# Altium PCB Watch_Input_PCB_Layout.PcbDoc
Units mil, origin at the board's own origin, x right, y up, seen from the top; angles counter-clockwise.
Board outline 1970 x 1500 mil, 2 copper layers (Top Layer, Bottom Layer); 9 components, 8 nets, 29 pads, 0 vias.
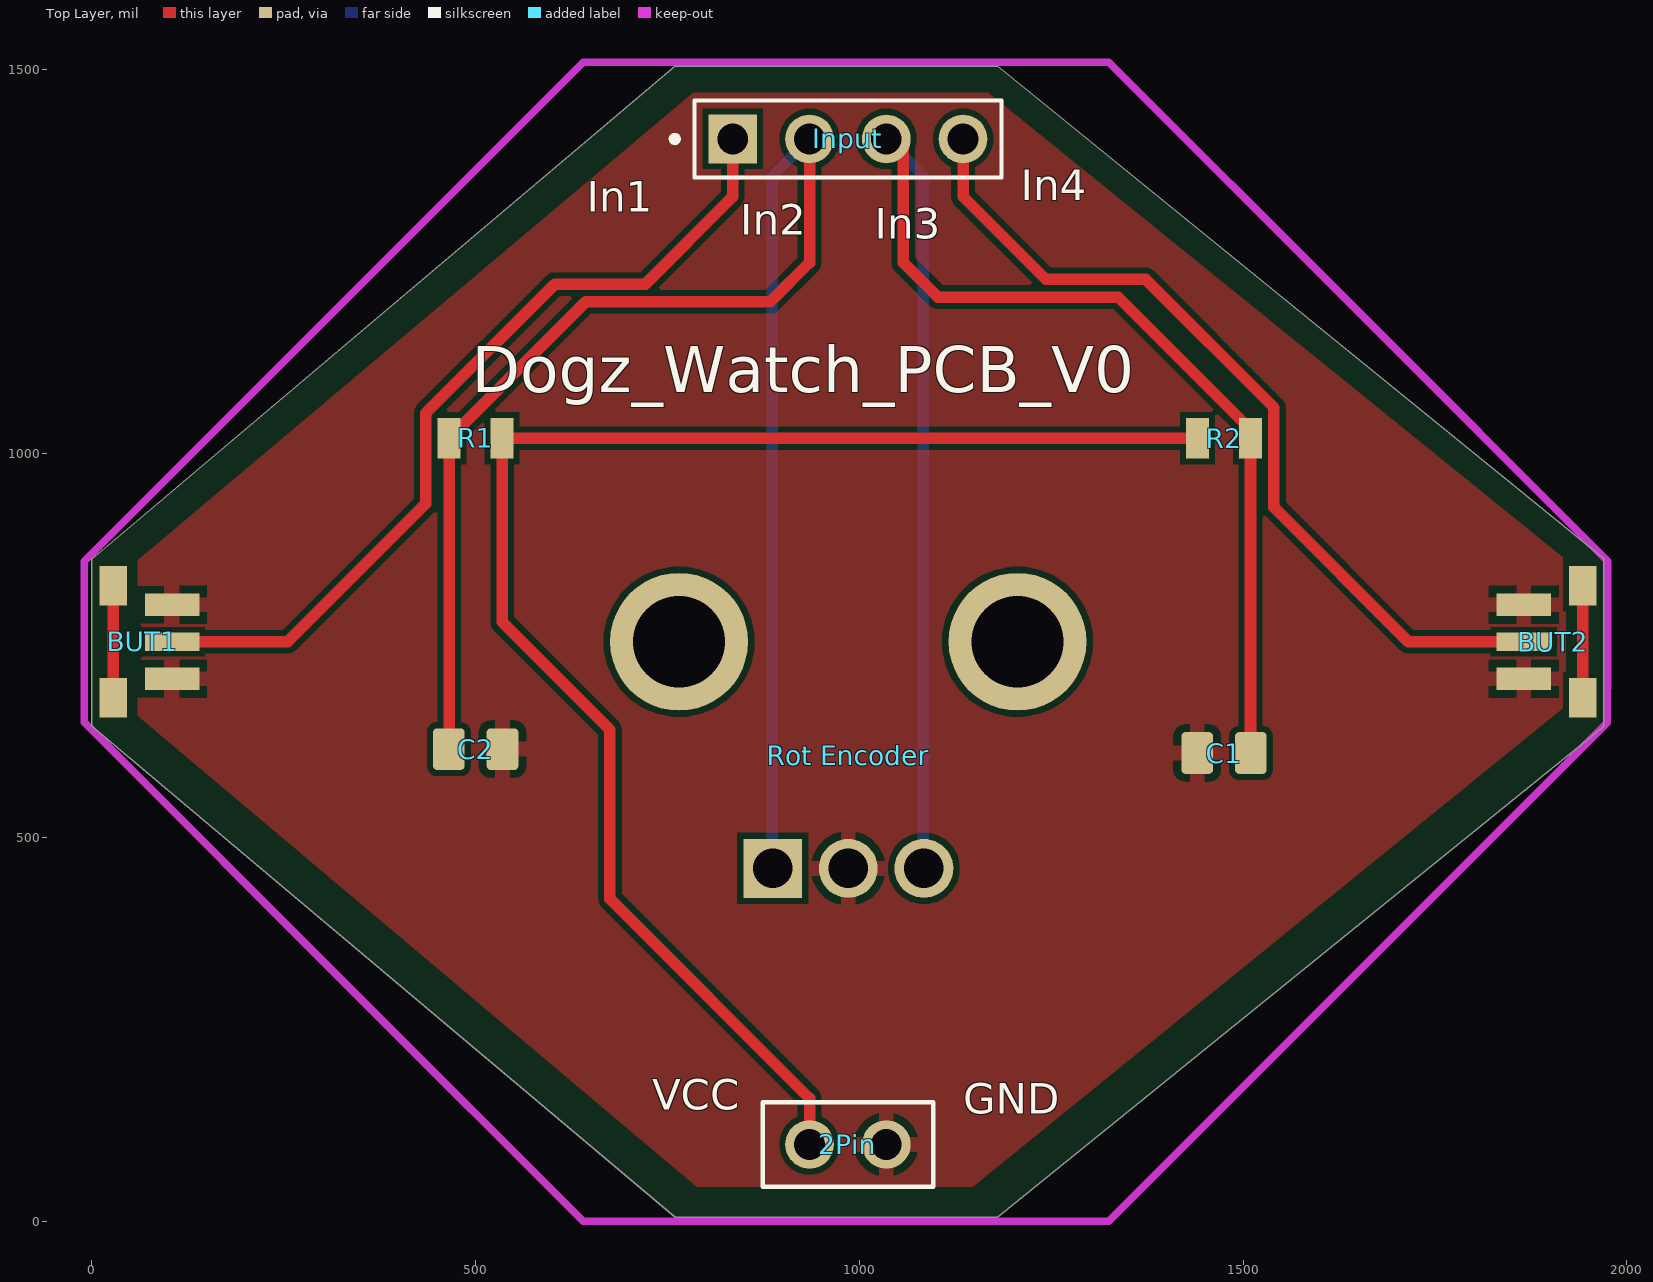
[diagram p0: Top Layer view]
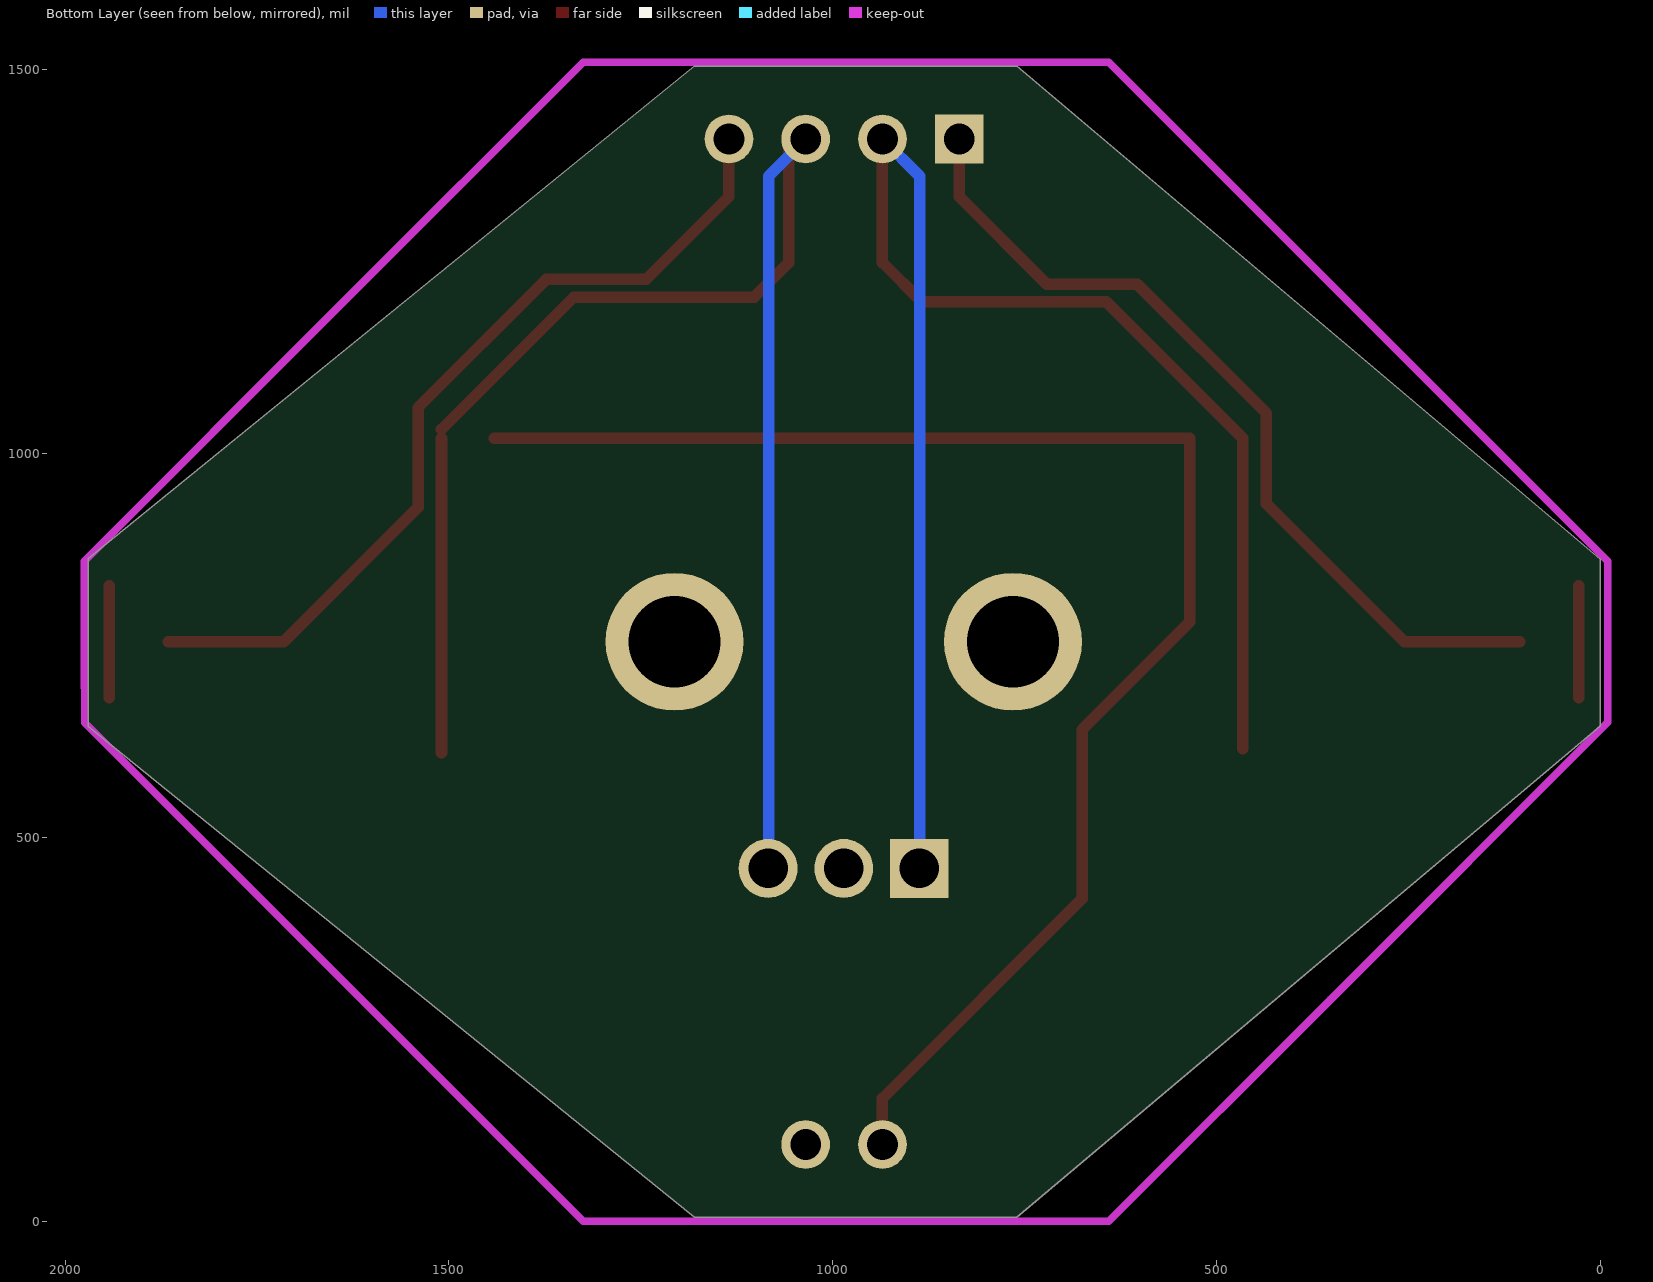
[diagram p1: Bottom Layer view, seen from below]

## Layer stack, top to bottom
Top Solder: solder mask 0.4, Solder Resist, Dk 3.5
Top Layer: signal copper 1.4
Dielectric 1: dielectric 12.6, FR-4, Dk 4.8
Bottom Layer: signal copper 1.4
Bottom Solder: solder mask 0.4, Solder Resist, Dk 3.5

## Board outline
1970,862.92 1970,645 1180,5 760,5 0,645 0,862.79 760,1505 1180,1505

## Design rules (kind name [scope] priority, off if disabled: settings)
BoardOutlineClearance [All] p1: gap=7.87 ignorepadtopadclearanceinfootprint=FALSE except(15.75: Arc-SplitBarrior Arc-SplitContinuation Track-SplitBarrior Track-SplitContinuation SMDPad-SplitBarrior SMDPad-SplitContinuation THPad-SplitBarrior THPad-SplitContinuation Via-SplitBarrior Via-SplitContinuation Fill-SplitBarrior Fill-SplitContinuation Poly-SplitBarrior Poly-SplitContinuation Region-SplitBarrior Region-SplitContinuation Text-SplitBarrior Text-SplitContinuation)
Clearance "Clearance Bottom Layer" [OnLayer('Bottom Layer')] p1: gap=8 ignorepadtopadclearanceinfootprint=TRUE except(10: Arc-Text Track-Text SMDPad-Text THPad-Text Via-Text Fill-Text Poly-Text Region-Text Text-Text)
Clearance "Clearance Top Layer" [OnLayer('Top Layer')] p2: gap=8 ignorepadtopadclearanceinfootprint=TRUE except(10: Arc-Text Track-Text SMDPad-Text THPad-Text Via-Text Fill-Text Poly-Text Region-Text Text-Text)
Clearance [All] p3: gap=7.87 ignorepadtopadclearanceinfootprint=FALSE except(3.5: Arc-Arc Arc-Track Arc-SMDPad Track-Track Track-SMDPad SMDPad-SMDPad; 5: Arc-Via Track-Via SMDPad-Via THPad-Via Via-Via; 10: Arc-Text Track-Text SMDPad-Text THPad-Text Via-Text Fill-Text Poly-Text Region-Text Text-Text)
HoleSize [All] p1: absolutevalues=TRUE maxlimit=248.03 minlimit=7.87 maxpercent=80.000 minpercent=20.000
MinimumAnnularRing [All] p1: minimumring=3
MinimumSolderMaskSliver [All] p1: minsoldermaskwidth=3.94
PolygonConnect PolygonConnect_1 [All] p1: thpad.connectstyle=Relief thpad.reliefconductorwidth=20 thpad.reliefentries=4 thpad.polygonreliefangle="90 Angle" thpad.airgapwidth=10 smdpad.connectstyle=Relief smdpad.reliefconductorwidth=20 smdpad.reliefentries=4 smdpad.polygonreliefangle="90 Angle" smdpad.airgapwidth=10 via.connectstyle=Direct via.reliefconductorwidth=20 via.reliefentries=4 via.polygonreliefangle="90 Angle" via.airgapwidth=10
RoutingCorners [All] p1: cornerstyle=Round minsetback=100 maxsetback=100
RoutingVias [All] p1: holewidth=19.68 width=39.37 viastyle="Through Hole" minholewidth=7.87 minwidth=17.72 maxholewidth=39.37 maxwidth=78.74
SilkToSilkClearance [All] p1: silktosilkclearance=3.94
SilkToSolderMaskClearance [IsPad] p1: minsilkscreentomaskgap=3.94 clearancetoexposedcopper=TRUE
SolderMaskExpansion [All] p1: expansion=4 istentingtop=FALSE
SupplyNets "Schematic Supply Nets_1" [InNet('GND')] p1: voltage=0.000
SupplyNets "Schematic Supply Nets" [InNet('VCC')] p2: voltage=0.000
Width [All] p1: maxlimit=100 minlimit=3.5 preferedwidth=15
25 further rules are at their usual default settings.

## Components (designator, comment, footprint, x,y, rotation, side; value= is the part's Value field where it differs from the comment)
2Pin "PRPC002SAAN-RC" CONN_PRPC002SAAN-RC_SUL 1035,100 r180 top (schematic designator 2pin)
BUT1 "1977067-1" TE_1977067-1 75,755 r270 top
BUT2 "1977067-1" TE_1977067-1 1895,755 r90 top
C1 "CL21B104KBCNNNC" CAPC2012X95N 1475,610 r0 top
C2 "CL21B104KBCNNNC" CAPC2012X95N 500,615 r180 top
Input "61300411121" WURTH_61300411121 985,1410 r0 top
R1 "RC0805FR-0710KP" RES_RC0805_2X1P25_YAG 500,1020 r0 top
R2 "RC0805FR-0710KP" RES_RC0805_2X1P25_YAG 1475,1020 r0 top
"Rot Encoder" "PES12-40S-N0024" PES1240SN0024 887.05,459.72 r0 top

## Footprints (in the part's own frame and the unit in brackets; to place one, negate y for a bottom-side part, rotate by r counter-clockwise, add the part's x,y. Pads: shape width x height; smd on the part's side, far side on the other; paste and mask are expansions set on the pad)
CAPC2012X95N [mm]
  rrect25% 1.05x1.38 smd: 1(-0.888,0) 2(0.888,0)
  body extent -1,-0.63 1,0.63, height 0.95
CONN_PRPC002SAAN-RC_SUL [mil]
  round 63.37 hole 40 paste-99999 mask+0: 1(0,0) 2(100,0)
  silkscreen extent -61,-55 161,55
PES1240SN0024 [mm]
  rect 1.95x1.95 hole 1.3: A1(0,0)
  round 1.95 hole 1.3: B1(5,0) C1(2.5,0)
  round 4.562 hole 3.041: MH1(-3.1,7.5) MH2(8.1,7.5)
RES_RC0805_2X1P25_YAG [mil]
  rect 30x53 smd paste+0 mask+0: 1(-34.5,0) 2(34.5,0)
TE_1977067-1 [mm]
  rect 0.75x1.8 smd: 1(-1.225,0.75) 3(1.225,0.75)
  rect 0.6x1.8 smd: 2(0,0.75)
  rect 1.3x0.9 smd: P1(-1.85,-1.2) P2(1.85,-1.2)
WURTH_61300411121 [mil]
  rect 63.37x63.37 hole 40: 01(-150,0)
  round 63.37 hole 40: 02(-50,0) 03(50,0) 04(150,0)
  silkscreen extent -230,-50 200,50, body extent -200,-50 200,50, height 286

## Part data
2Pin: "CONN HEADER .100 SNGL STR 2POS", Manufacturer_Name=Sullins, Copyright="Copyright (C) 2025 Ultra Librarian. All rights reserved.", Manufacturer_Part_Number=PRPC002SAAN-RC, RefDes=RefDes, Type=Type
BUT1 BUT2: "Switch Tactile OFF (ON) SPST Round Button Gull Wing 0.05A 12VDC 100000Cycles 1.57N SMD T/R", Package=None, Availability=Warning, Check_prices=https://www.snapeda.com/parts/1977067-1/TE%20Connectivity%20ALCOSWITCH%20Switches/view-part/2191392/?ref=eda, MF="TE Connectivity", MP=1977067-1, Price=None, SnapEDA_Link=https://www.snapeda.com/parts/1977067-1/TE%20Connectivity%20ALCOSWITCH%20Switches/view-part/2191392/?ref=snap
C1 C2: "0.1 ÂµF Â±10% 50V Ceramic Capacitor X7R 0805 (2012 Metric)", Package="SMD-2 Samsung", Check_prices=https://www.snapeda.com/parts/CL21B104KBCNNNC/Samsung/view-part/?ref=eda, MF="Samsung Electro-Mechanics", MP=CL21B104KBCNNNC, SnapEDA_Link=https://www.snapeda.com/parts/CL21B104KBCNNNC/Samsung/view-part/?ref=snap
Input: "Connector Header Through Hole 4 position 0.100 (2.54mm)", Package=None, Check_prices=https://www.snapeda.com/parts/61300411121/W%25C3%25BCrth+Elektronik+Midcom/view-part/?ref=eda, MF="WÃ¼rth Elektronik", MP=61300411121, SnapEDA_Link=https://www.snapeda.com/parts/61300411121/W%25C3%25BCrth+Elektronik+Midcom/view-part/?ref=snap
R1 R2: "No Description Available", Manufacturer_Name=Yageo, Copyright="Copyright (C) 2025 Ultra Librarian. All rights reserved.", Manufacturer_Part_Number=RC0805FR-0710KP
"Rot Encoder": "ENCODER ROTARY", Manufacturer_Name=Bourns, Mouser Part Number=652-PES12-40S-N0024, Datasheet Link=https://www.bourns.com/docs/Product-Datasheets/PES12.pdf, Geometry.Height=8.5mm, Manufacturer_Part_Number=PES12-40S-N0024, Mouser Price/Stock=https://www.mouser.co.uk/ProductDetail/Bourns/PES12-40S-N0024?qs=9fn1gpisni7PBzk9dl6VPg%3D%3D

## Nets (pads, with @x,y where several pads share a name; then routed paths per layer and width w, separated by ;. In a path a pad name is that pad's centre, name@x,y a point inside that pad or via, vN(x,y) a via of type N, cw(c..) or ccw(c..) an arc to the next point about the centre after c; other vN are vias at no path point)
GND: 2Pin.1 "Rot Encoder.C1" BUT1.1 BUT1.3 BUT2.1 BUT2.3 C1.1 C2.1
NetBUT1_2: BUT1.2 Input.01 | length 1114.8
  Top Layer w15: BUT1.2 255,755 435,935 435,1052.92 602.93,1220.85 720.85,1220.85 835,1335 Input.01
NetBUT1_P1: BUT1.P1 BUT1.P2 | length 145.7
  Top Layer w15: BUT1.P2 BUT1.P1
NetBUT2_2: BUT2.2 Input.04 | length 1121.9
  Top Layer w15: Input.04 1135,1335 1243,1227 1373,1227 1540,1060 1540,930 1715,755 BUT2.2
NetBUT2_P1: BUT2.P1 BUT2.P2 | length 145.7
  Top Layer w15: BUT2.P1 BUT2.P2
NetC1_2: "Rot Encoder.B1" C1.2 Input.03 R2.2 | length 2105.2
  Top Layer w15: Input.03 1057,1410 1057,1249 1102,1204 1337,1204 R2.2@1509.5,1031.5 ; C1.2@1509.5,610.46 R2.2
  Bottom Layer w15: Input.03 1083.43,1361.57 1083.43,460
NetC2_2: "Rot Encoder.A1" C2.2 Input.02 R1.1 | length 2100
  Top Layer w15: C2.2@465.5,615.46 R1.1 643.35,1197.85 883.85,1197.85 935,1249 Input.02
  Bottom Layer w15: 886.58,460 886.58,1361.58 Input.02
VCC: 2Pin.2 R1.2 R2.1 | length 1991.9
  Top Layer w15: 2Pin.2 935,160 675,420 675,640.25 534.5,780.75 R1.2 R2.1
pads on no net: "Rot Encoder.MH1" "Rot Encoder.MH2"

## Polygon pours and split planes (outlines as drawn)
GND on Top Layer "GND_L01_P002" (solid, pour order 2): 783.58,1470 60,861.42 60,658.42 787.81,45 1147.58,45 1920,671.14 1920,861.66 1167.95,1470

## Keep-outs
Keep-Out Layer:
  lines w10: -10,650 -10,860 640,1510 1325,1510 1640,1195 1975,860 1975,695 1974.38,694.38 1974.38,649.38 1325,0 891.25,0 640,0 351.25,288.75 -10,650

## Silkscreen, mask and mechanical layers (free items; w line width, h text height)
Top Overlay:
  text "In4" at 1210,1330 h40
  text "In1" at 645,1315 h40
  text "In2" at 845,1285 h40
  text "In3" at 1020,1280 h40
  text "Dogz_Watch_PCB_V0" at 495,1079.99 h60
  text "VCC" at 730,145.01 h40
  text "GND" at 1135,140 h40
Mechanical 1:
  the board outline again, w10